# EAGLE board coil-control-module-v4 (EAGLE 7.1.0)
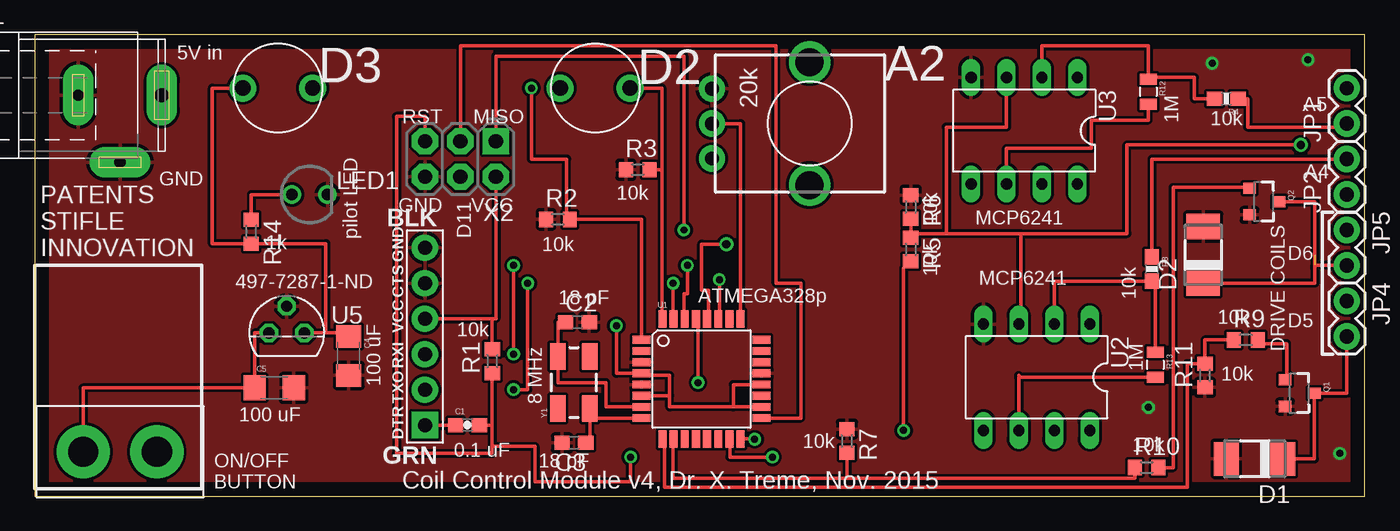
[diagram p0: board, top side]
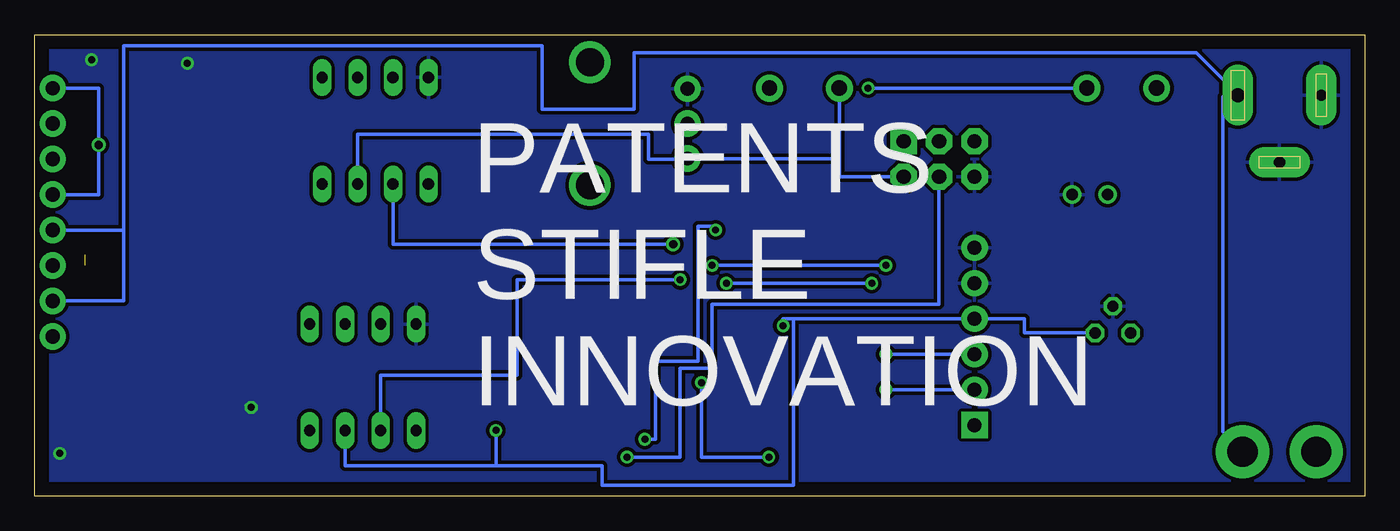
[diagram p1: board, bottom side, seen from below]

Size 95.25 x 33.02 mm. Coordinates in mm from the lower left corner, seen from the top.
Outline: 0,0 95.25,0 95.25,33.02 0,33.02 0,0
Copper layers (1*16): Top 0.035mm / dielectric 1.5mm / Bottom 0.035mm
Design rules "default": minimum track width 10mil, minimum drill 24mil, track to track 8mil, track to pad 8mil, pad to pad 8mil, via to via 8mil, smd to smd 8mil, copper to edge 40mil, drill to drill 8mil, minimum pad ring 10mil, minimum via ring 8mil, stop-mask expansion 4mil, vias tented up to drill 0mil, thermal gap 10mil
Net classes: 0 default: width 0.203 mm; 1 vcc: width 0.254 mm

## Footprints (pad centres in the part's own frame; a part is rotated, then mirrored left to right if it is on the bottom)
0603-CAP = smd 1.1 x 1: 1 -0.85,0; 2 0.85,0
C0603 = smd 1.1 x 1: 1 -0.85,0; 2 0.85,0
1206 = smd 1.6 x 1.8: 1 -1.4,0; 2 1.4,0
DO-214AC = smd 1.8 x 2.4: A 2.025,0; C -2.025,0
SPC4078 = drill 0.8 pad 2.184 long: 1 -3,0; 2 0,-4.8 | drill 1 pad 2.184 long: 3 3,0
1X02 = drill 1.016 pad 1.88: 1 0,0; 2 2.54,0
LED3MM-NS = drill 0.813: A -1.27,0; K 1.27,0
SOT-23 = smd 0.8 x 0.9: 1 -0.95,-1; 2 0.95,-1; 3 0,1.1
R0603 = smd 1 x 1.1: 1 -0.85,0; 2 0.85,0
0603-RES = smd 1.1 x 1: 1 -0.85,0; 2 0.85,0
0805 = smd 0.8 x 1.2: 1 -0.9,0; 2 0.9,0
ALPS_POT_KIT = drill 1 pad 1.88: P$1 7,-2.5; P$2 7,0; P$3 7,2.5 | drill 2: P$4 0,-4.4; P$5 0,4.4
CW182-ND = drill 2.159 pad 3.81: P$1 -2.642,0; P$2 2.642,0
BUTTON = drill 1.1 pad 1.93: P$1 -2.499,0; P$2 2.499,0
TQFP32-08 = smd 1.27 x 0.559: 1 -4.293,2.8; 2 -4.293,2; 3 -4.293,1.2; 4 -4.293,0.4; 5 -4.293,-0.4; 6 -4.293,-1.2; 7 -4.293,-2; 8 -4.293,-2.8; 17 4.293,-2.8; 18 4.293,-2; 19 4.293,-1.2; 20 4.293,-0.4; 21 4.293,0.4; 22 4.293,1.2; 23 4.293,2; 24 4.293,2.8 | smd 0.559 x 1.27: 9 -2.8,-4.293; 10 -2,-4.293; 11 -1.2,-4.293; 12 -0.4,-4.293; 13 0.4,-4.293; 14 1.2,-4.293; 15 2,-4.293; 16 2.8,-4.293; 25 2.8,4.293; 26 2,4.293; 27 1.2,4.293; 28 0.4,4.293; 29 -0.4,4.293; 30 -1.2,4.293; 31 -2,4.293; 32 -2.8,4.293
DIP08 = drill 0.813 long: 1 -2.54,-3.81; 2 0,-3.81; 3 2.54,-3.81; 4 5.08,-3.81; 5 5.08,3.81; 6 2.54,3.81; 7 0,3.81; 8 -2.54,3.81
TO92-3 = drill 0.813 octagon: 1 -1.27,0; 2 0,1.905; 3 1.27,0
FTDI_DEVICE_SIDE = drill 1.016 pad 1.88 square: P$1 -6.35,0 | drill 1.016 pad 1.88: P$2 -3.81,0; P$3 -1.27,0; P$4 1.27,0; P$5 3.81,0; P$6 6.35,0
2X3-NS = drill 1.016 pad 1.88 square: 1 -2.54,-1.27 | drill 1.016 pad 1.88 octagon: 2 -2.54,1.27; 3 0,-1.27; 4 0,1.27; 5 2.54,-1.27; 6 2.54,1.27
CRYSTAL-SMD-5X3 = smd 1.9 x 1.1: 1 -1.85,-1.15; 2 1.85,-1.15; 3 1.85,1.15; 4 -1.85,1.15

## Placement (x,y rotation side)
C1  100 nF  [0603-CAP]  30.99,5.08 0 top
C2  18pF  [C0603]  38.86,12.45 0 top
C3  18pF  [C0603]  38.61,3.81 180 top
C4  100 uF  [1206]  22.48,10.03 270 top
C5  100 uF  [1206]  17.14,7.75 0 top
D1  [DO-214AC]  87.38,2.67 180 top
D2  [DO-214AC]  83.69,17.27 90 top
J1  [SPC4078]  6.1,28.7 0 top
JP1  [1X02]  93.98,26.67 90 top
JP2  [1X02]  93.98,21.59 90 top
JP4  [1X02]  93.98,13.97 270 top
JP5  [1X02]  93.98,19.05 270 top
LED1  [LED3MM-NS]  19.68,21.59 0 top
Q1  IRLML0060  [SOT-23]  90.55,7.37 270 top
Q2  IRLML0060  [SOT-23]  88.01,21.08 270 top
R1  10K  [R0603]  32.77,9.65 90 top
R2  10K  [R0603]  37.47,19.81 0 top
R3  10K  [R0603]  43.18,23.37 0 top
R4  10k  [0603-RES]  85.34,28.45 180 top
R5  10K  [R0603]  62.74,17.65 270 top
R6  10K  [R0603]  62.74,20.7 270 top
R7  10K  [R0603]  58.17,3.94 270 top
R8  10k  [0603-RES]  80.01,16.26 270 top
R9  10K  [R0603]  86.74,11.18 0 top
R10  10K  [R0603]  79.63,2.03 0 top
R11  10K  [R0603]  83.82,8.64 90 top
R12  1M  [0805]  79.76,28.96 270 top
R13  1M  [0805]  80.26,9.4 270 top
R14  3.3k  [R0603]  15.49,18.92 270 top
R15  20k  [ALPS_POT_KIT]  55.5,26.67 180 top
SW1  CW182-ND  [CW182-ND]  6.1,3.17 180 top
SW2  BUTTON  [BUTTON]  40.13,29.21 0 top
SW3  BUTTON  [BUTTON]  17.4,29.21 0 top
U1  ATMEGA328P  [TQFP32-08]  47.75,8.38 0 top
U2  LM4250  [DIP08]  73.03,8.51 180 top
U3  LM4250  [DIP08]  72.14,26.16 180 top
U5  L78L33ABZ-AP  [TO92-3]  18.03,11.68 0 top
X1  FTDI_DEVICE  [FTDI_DEVICE_SIDE]  27.94,11.43 90 top
X2  [2X3-NS]  30.48,24.13 180 top
Y1  16 MHz  [CRYSTAL-SMD-5X3]  38.61,8.13 90 top

## Library data of the parts
C1 R12 R13 = SparkFun-Passives
C2 C3 R1-R3 R5-R7 R9-R11 R14 = resistor
C4 C5 = SparkFun-Capacitors
D1 D2 = diode
J1 = con-jack; OC_FARNELL: unknown; OC_NEWARK: unknown
JP1 JP2 JP4 JP5 X1 X2 = SparkFun-Connectors
LED1 = SparkFun-LED
Q1 Q2 SW1-SW3 U2 U3 U5 = spietz-library
R4 R8 = SparkFun-Resistors
R15 = SparkFun-Electromechanical
U1 = SparkFun-DigitalIC; PROD_ID: IC-09069
Y1 = SparkFun-FreqCtrl

## Nets
/RST: C1.2 R1.1 U1.29 X2.5
A2: R15.P$2 U1.25
A4: R13.2 U1.27 U2.6
A5: R12.2 U1.28 U3.6
D2: R3.2 SW2.P$2 U1.32
D3: R2.2 SW3.P$2 U1.1
D5: R9.1 R11.2 U1.9
D6: R7.2 R10.1 U1.10
D9: U1.13
D10: U1.14
GND: C2.2 C3.2 C4.2 C5.2 D1.A D2.A J1.1 J1.2 LED1.K Q1.2 Q2.2 R2.1 R3.1 R6.1 R7.1 R11.1 R15.P$1 U1.3 U1.5 U1.21 U2.4 U3.4 U5.2 X1.P$5 X1.P$6 X2.6
GRN: C1.1 X1.P$1
MIDV: JP1.2 JP2.1 R5.1 R6.2 U2.3 U3.3
MISO: U1.16 X2.1
MOSI: U1.15 X2.4
N$3: R4.2 R12.1 U3.2
N$4: C2.1 U1.7 Y1.3
N$10: LED1.A R14.1
N$11: C3.1 U1.8 Y1.1
N$13: Q1.1 R9.2
N$14: R8.2 R13.1 U2.2
N$15: D1.C JP4.2 Q1.3
N$17: Q2.1 R10.2
N$18: D2.C JP5.2 Q2.3
RX: U1.30 X1.P$3
SCK: U1.17 X2.3
SENSECOIL: JP2.2 R8.1
SENSECOIL2: JP1.1 R4.1
TX: U1.31 X1.P$2
VCC: C4.1 R1.2 R5.2 R14.2 R15.P$3 SW2.P$1 SW3.P$1 U1.4 U1.6 U1.18 U1.20 U2.7 U3.7 U5.3 X1.P$4 X2.2
VIN: C5.1 SW1.P$2 U5.1
VPOWER: J1.3 JP4.1 JP5.1 SW1.P$1

## Tracks (layer width: path | path; a pad name or v marks a point on that pad's centre or on a via)
/RST  (via drill 0.5)
  Top 0.254: C1.2 32.77,5.08 | U1.29 47.5,12.68 v47.5,8.13 | R1.1 32.77,5.08 | 32.77,5.08 32.77,3.56 | 32.77,3.56 35.81,3.56 35.81,1.02 42.67,1.02 v42.67,2.79 | X2.5 27.94,27.18 25.91,27.18 25.91,3.05 32.77,3.05 32.77,3.56
  Bottom 0.254: v42.67,2.79 47.5,2.79 v47.5,8.13
A2
  Top 0.254: R15.P$2 50.55,26.67 U1.25
A4  (via drill 0.5)
  Top 0.254: 70.48,8.55 U2.6 70.48,8.5 | U1.27 49.02,12.68 v49.02,15.49 | R13.2 70.48,8.5 | 70.48,8.5 70.48,8.64
  Bottom 0.254: v49.02,15.49 60.71,15.49 60.71,8.64 70.48,8.64 U2.6
A5  (via drill 0.6)
  Top 0.254: U1.28 48.26,12.68 48.26,14.73 47.75,14.73 47.75,18.03 v49.53,18.03 | U3.6 69.6,24.89 75.69,24.89 75.69,26.92 79.76,26.92 R12.2
  Bottom 0.254: v49.53,18.03 69.6,18.03 U3.6
D2
  Top 0.254: U1.32 44.92,12.68 44.92,23.37 | SW2.P$2 44.92,29.21 44.92,23.37 | R3.2 44.92,23.37
D3  (via drill 0.5)
  Top 0.254: 43.39,11.18 U1.1 43.46,19.81 R2.2 38.1,19.81 38.1,24.13 35.56,24.13 v35.56,29.21
  Bottom 0.254: v35.56,29.21 SW3.P$2
D5
  Top 0.254: U1.9 45.09,4.09 45.09,0.64 82.55,0.64 82.55,9.49 R11.2 | 83.57,9.65 R11.2 | R9.1 83.82,11.18 R11.2
D6
  Top 0.254: U1.10 45.72,4.09 45.72,1.27 58.17,1.27 | 58.17,1.27 78.78,1.27 R10.1 | R7.2 58.17,1.27
GND  (via drill 0.5)
  other vias: 79.76,6.35 93.47,3.05 84.33,30.99 91.19,31.24
  pour Top (isolate 0.152): -1.02,34.16 -1.27,-1.27 96.77,-1.14 96.77,34.04
  pour Bottom (isolate 0.254): -2.54,35.81 -2.79,-3.05 98.81,-2.67 98.55,35.69
GRN
  Top 0.254: X1.P$1 C1.1
MIDV  (via drill 0.6)
  Top 0.254: R6.2 62.74,18.8 | 62.74,18.8 R5.1 | U2.3 70.61,12.32 70.61,18.8 | 70.61,18.8 65.28,18.8 | 65.28,18.8 62.74,18.8 | U3.3 69.6,26.42 65.28,26.42 65.28,18.8 | 70.61,18.8 78.23,18.8 78.23,25.15 v90.68,25.15
  Bottom 0.254: JP1.2 90.68,29.21 v90.68,25.15 90.68,21.59 JP2.1
MISO  (via drill 0.5)
  Top 0.254: X2.1 33.02,31.5 46.48,31.5 v46.48,19.05 | U1.16 51.56,4.09 v51.56,4.06
  Bottom 0.254: v51.56,4.06 50.8,4.06 50.8,9.65 47.75,9.65 47.75,19.3 46.48,19.3 v46.48,19.05
MOSI  (via drill 0.5)
  Top 0.254: U1.15 49.78,4.09 49.78,2.79 v52.83,2.79
  Bottom 0.254: v52.83,2.79 49.02,2.79 49.02,9.14 46.74,9.14 46.74,13.72 30.48,13.72 X2.4
N$3
  Top 0.254: R4.2 83.06,28.45 83.06,29.97 79.76,29.97 R12.1 79.76,32.26 72.14,32.26 U3.2
N$4
  Top 0.254: U1.7 40.89,6.38 40.89,8.13 37.46,8.13 Y1.3 37.46,12.45 C2.1
N$10
  Top 0.254: LED1.A 15.49,21.59 R14.1
N$11
  Top 0.254: U1.8 40.27,5.58 Y1.1 39.76,3.81 C3.1
N$13
  Top 0.254: Q1.1 89.66,8.32 89.66,10.92 87.59,10.92 R9.2
N$14
  Top 0.254: U2.2 73.03,15.37 77.98,15.37 | 77.98,15.37 R8.2 | 77.98,15.37 80.26,15.37 R13.1
N$15
  Top 0.254: JP4.2 93.98,7.37 Q1.3 91.65,2.67 D1.C
N$17
  Top 0.254: R10.2 81.53,2.03 81.53,22.1 87.01,22.1 Q2.1
N$18  (1 unrouted)
  Top 0.254: D2.C 86.74,15.24 91.69,15.24 91.69,16.26 91.69,16.51 | Q2.3 91.69,21.08 91.69,17.27 91.69,16.51 | JP5.2 91.69,16.51
RX  (via drill 0.5)
  Top 0.254: U1.30 46.48,12.68 46.48,14.48 46.74,14.48 v46.74,16.51 | v34.29,16.51 v34.29,10.16
  Bottom 0.254: v46.74,16.51 v34.29,16.51 | v34.29,10.16 X1.P$3
SCK
  Top 0.254: U1.17 54.86,5.58 54.86,15.24 53.09,15.24 53.09,32.26 30.48,32.26 X2.3
SENSECOIL
  Top 0.254: JP2.2 80.01,24.13 R8.1
SENSECOIL2
  Top 0.254: R4.1 86.87,28.45 86.87,26.42 93.98,26.42 JP1.1
TX  (via drill 0.5)
  Top 0.254: U1.31 45.72,12.68 v45.72,15.24 | v34.29,7.62 35.31,7.62 v35.31,15.24
  Bottom 0.254: X1.P$2 v34.29,7.62 | v35.31,15.24 v45.72,15.24
VCC  (via drill 0.5)
  Top 0.254: X1.P$4 32.77,12.7 | 32.77,12.7 R1.2 | U1.6 45.47,7.18 | 45.47,7.18 45.47,8.64 43.46,8.64 U1.4 41.66,8.78 v41.66,12.19 | U1.18 50.04,6.38 | 50.04,6.38 45.47,6.38 45.47,7.18 | U1.20 50.04,7.98 50.04,6.38 | X2.2 33.02,12.7 32.77,12.7 | 21.72,10.79 C4.1 22.48,11.68 20.83,11.68 | SW3.P$1 12.7,29.21 12.7,18.07 R14.2 20.83,18.07 20.83,11.68 | R5.2 62.23,16.3 v62.23,4.7 | U5.3 20.83,11.68
  Bottom 0.254: X2.2 37.63,22.86 37.63,24.17 | 37.63,24.17 SW2.P$1 | 37.63,24.17 R15.P$3 48.5,24.13 51.31,24.13 51.31,25.91 72.14,25.91 U3.7 | v41.66,12.19 41.66,12.7 40.89,12.7 | 40.89,12.7 X1.P$4 24.38,12.7 24.38,11.68 U5.3 | 40.89,12.7 40.89,0.76 54.61,0.76 54.61,2.16 62.23,2.16 | U2.7 73.03,2.16 62.23,2.16 | v62.23,4.7 62.23,2.16
VIN
  Top 0.254: SW1.P$2 3.45,7.75 C5.1 15.74,11.68 U5.1
VPOWER
  Bottom 0.254: SW1.P$1 10.16,4.6 10.16,28.57 10.03,28.7 J1.3 9.1,28.78 12.06,31.75 52.32,31.75 52.32,27.69 58.93,27.69 58.93,32.26 88.9,32.26 88.9,19.05 | JP4.1 88.9,13.97 88.9,19.05 | JP5.1 88.9,19.05

## Text on the board
tPlace: 5V in | D3 | D2 | A2 | 1M | RST | MISO | A5 | 10k | pilot LED | A4 | GND | 10k | 10k | GND | D11 | VCC | MCP6241 | 1k | 10k | DRIVE COILS | 10k | D6 | PATENTS / STIFLE / INNOVATION | MCP6241 | 10k | 497-7287-1-ND | 18 pF | ATMEGA328p | D5 | 10k | 10k | 8 MHz | 1M | 100 uF | 10k | 100 uF | 0.1 uF | 10k | 10k | 18 pF | Coil Control Module v4, Dr. X. Treme, Nov. 2015 | ON/OFF / BUTTON
bPlace: PATENTS / STIFLE / INNOVATION